# Altium PCB SC-70-5_L2.1-W1.3-P0.65-LS2.1-BL_2021-01-09 (1).pcbdoc
Units mm, origin at the board's own origin, x right, y up, seen from the top; angles counter-clockwise.
Board outline 32.14 x 28.85 mm, 2 copper layers (Top Layer, Bottom Layer); 1 components, 0 nets, 5 pads, 0 vias.
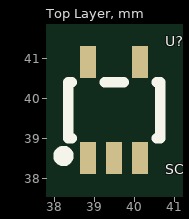
[diagram p0: Top Layer view]
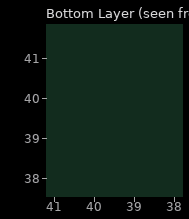
[diagram p1: Bottom Layer view, seen from below]

## Layer stack, top to bottom
Top Layer: signal copper (thickness not stored)
Dielectric: dielectric 0.32, FR-4, Dk 4.8
Bottom Layer: signal copper (thickness not stored)

## Board outline
57.538,25.4 25.4,25.4 25.4,54.254 57.538,54.254

## Components (designator, comment, footprint, x,y, rotation, side; value= is the part's Value field where it differs from the comment)
U? "SC-70-5_L2.1-W1.3-P0.65-LS2.1-BL" SC-70-5_L2.1-W1.3-P0.65-LS2.1-BL 39.437,39.7 r0 top

## Footprints (in the part's own frame and the unit in brackets; to place one, negate y for a bottom-side part, rotate by r counter-clockwise, add the part's x,y. Pads: shape width x height; smd on the part's side, far side on the other; paste and mask are expansions set on the pad)
SC-70-5_L2.1-W1.3-P0.65-LS2.1-BL [mm]
  rect 0.4x0.8 smd: 1(-0.59,-1.2) 2(0.06,-1.2) 3(0.71,-1.2) 4(0.71,1.2) 5(-0.59,1.2)
  silkscreen extent -1.34,-1.27 1.21,0.7

## Nets (pads, with @x,y where several pads share a name; then routed paths per layer and width w, separated by ;. In a path a pad name is that pad's centre, name@x,y a point inside that pad or via, vN(x,y) a via of type N, cw(c..) or ccw(c..) an arc to the next point about the centre after c; other vN are vias at no path point)
pads on no net: U?.1 U?.2 U?.3 U?.4 U?.5

## Silkscreen, mask and mechanical layers (free items; w line width, h text height)
Document:
  lines w0.003: 41.444,39.802 41.494,39.852